# EAGLE board fox (EAGLE 4.16)
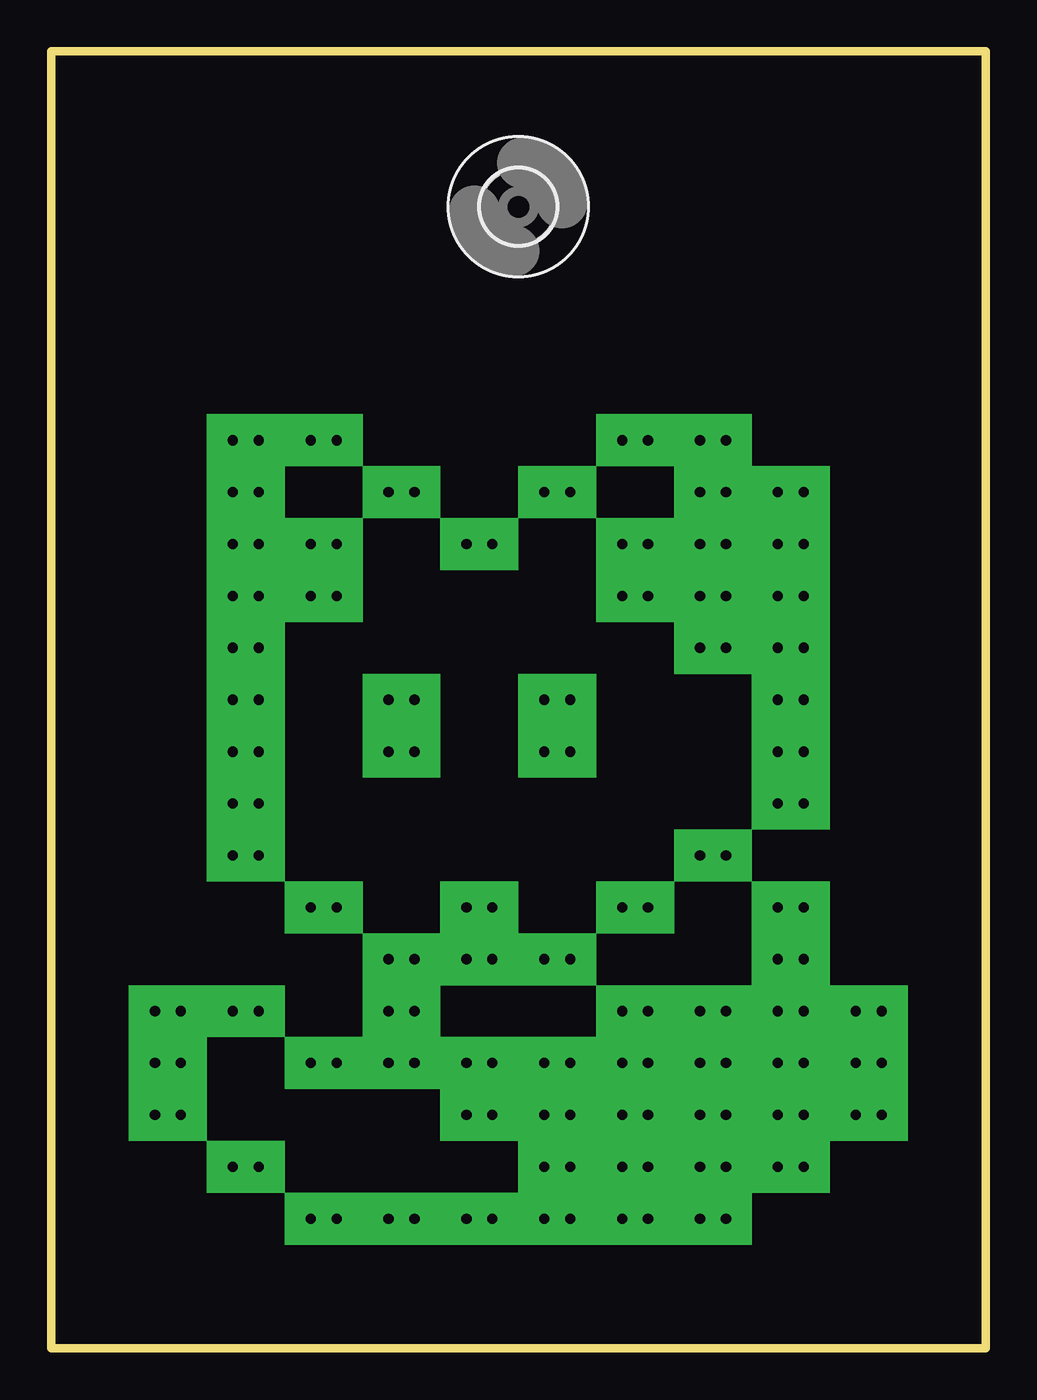
[diagram p0: board, top side]

Size 45.72 x 63.5 mm. Coordinates in mm from the lower left corner, seen from the top.
Outline: 0,63.5 0,0 45.72,0 45.72,63.5 0,63.5
Copper layers (1*16): Top 0.035mm / dielectric 1.5mm / Bottom 0.035mm
Design rules "default": minimum track width 10mil, minimum drill 24mil, track to track 8mil, track to pad 8mil, pad to pad 8mil, via to via 8mil, smd to smd 8mil, copper to edge 40mil, drill to drill 8mil, minimum pad ring 10mil, minimum via ring 8mil, stop-mask expansion 4mil, vias tented up to drill 0mil, thermal gap 10mil

## Footprints (pad centres in the part's own frame; a part is rotated, then mirrored left to right if it is on the bottom)
3,6 = hole 3.6: 0,0

## Placement (x,y rotation side)
E$1  [3,6]  22.86,55.88 0 top

## Library data of the parts
E$1 = Basic

## Tracks (layer width: path | path; a pad name or v marks a point on that pad's centre or on a via)
S$71  (via drill 0.5 pad 2.54)
  other vias: 12.7,6.35
S$72  (via drill 0.5 pad 2.54)
  other vias: 13.97,6.35
S$73  (via drill 0.5 pad 2.54)
  other vias: 16.51,6.35
S$81  (via drill 0.5 pad 2.54)
  other vias: 17.78,6.35
S$82  (via drill 0.5 pad 2.54)
  other vias: 20.32,6.35
S$83  (via drill 0.5 pad 2.54)
  other vias: 21.59,6.35
S$84  (via drill 0.5 pad 2.54)
  other vias: 24.13,6.35
S$85  (via drill 0.5 pad 2.54)
  other vias: 25.4,6.35
S$86  (via drill 0.5 pad 2.54)
  other vias: 27.94,6.35
S$87  (via drill 0.5 pad 2.54)
  other vias: 29.21,6.35
S$88  (via drill 0.5 pad 2.54)
  other vias: 31.75,6.35
S$89  (via drill 0.5 pad 2.54)
  other vias: 33.02,6.35
S$90  (via drill 0.5 pad 2.54)
  other vias: 10.16,8.89
S$91  (via drill 0.5 pad 2.54)
  other vias: 8.89,8.89
S$92  (via drill 0.5 pad 2.54)
  other vias: 6.35,11.43
S$93  (via drill 0.5 pad 2.54)
  other vias: 5.08,11.43
S$94  (via drill 0.5 pad 2.54)
  other vias: 5.08,13.97
S$95  (via drill 0.5 pad 2.54)
  other vias: 6.35,13.97
S$96  (via drill 0.5 pad 2.54)
  other vias: 5.08,16.51
S$97  (via drill 0.5 pad 2.54)
  other vias: 6.35,16.51
S$98  (via drill 0.5 pad 2.54)
  other vias: 8.89,16.51
S$99  (via drill 0.5 pad 2.54)
  other vias: 10.16,16.51
S$100  (via drill 0.5 pad 2.54)
  other vias: 12.7,13.97
S$101  (via drill 0.5 pad 2.54)
  other vias: 13.97,13.97
S$102  (via drill 0.5 pad 2.54)
  other vias: 16.51,13.97
S$103  (via drill 0.5 pad 2.54)
  other vias: 17.78,13.97
S$104  (via drill 0.5 pad 2.54)
  other vias: 20.32,13.97
S$105  (via drill 0.5 pad 2.54)
  other vias: 21.59,13.97
S$106  (via drill 0.5 pad 2.54)
  other vias: 31.75,8.89
S$107  (via drill 0.5 pad 2.54)
  other vias: 33.02,8.89
S$108  (via drill 0.5 pad 2.54)
  other vias: 35.56,8.89
S$109  (via drill 0.5 pad 2.54)
  other vias: 36.83,8.89
S$110  (via drill 0.5 pad 2.54)
  other vias: 29.21,8.89
S$111  (via drill 0.5 pad 2.54)
  other vias: 27.94,8.89
S$112  (via drill 0.5 pad 2.54)
  other vias: 25.4,8.89
S$113  (via drill 0.5 pad 2.54)
  other vias: 24.13,8.89
S$114  (via drill 0.5 pad 2.54)
  other vias: 21.59,11.43
S$115  (via drill 0.5 pad 2.54)
  other vias: 20.32,11.43
S$116  (via drill 0.5 pad 2.54)
  other vias: 24.13,11.43
S$117  (via drill 0.5 pad 2.54)
  other vias: 25.4,11.43
S$118  (via drill 0.5 pad 2.54)
  other vias: 27.94,11.43
S$119  (via drill 0.5 pad 2.54)
  other vias: 29.21,11.43
S$120  (via drill 0.5 pad 2.54)
  other vias: 31.75,11.43
S$121  (via drill 0.5 pad 2.54)
  other vias: 33.02,11.43
S$122  (via drill 0.5 pad 2.54)
  other vias: 35.56,11.43
S$123  (via drill 0.5 pad 2.54)
  other vias: 36.83,11.43
S$124  (via drill 0.5 pad 2.54)
  other vias: 39.37,11.43
S$125  (via drill 0.5 pad 2.54)
  other vias: 40.64,11.43
S$126  (via drill 0.5 pad 2.54)
  other vias: 40.64,13.97
S$127  (via drill 0.5 pad 2.54)
  other vias: 39.37,13.97
S$128  (via drill 0.5 pad 2.54)
  other vias: 40.64,16.51
S$129  (via drill 0.5 pad 2.54)
  other vias: 39.37,16.51
S$130  (via drill 0.5 pad 2.54)
  other vias: 36.83,16.51
S$131  (via drill 0.5 pad 2.54)
  other vias: 35.56,16.51
S$132  (via drill 0.5 pad 2.54)
  other vias: 35.56,19.05
S$133  (via drill 0.5 pad 2.54)
  other vias: 36.83,19.05
S$134  (via drill 0.5 pad 2.54)
  other vias: 36.83,21.59
S$135  (via drill 0.5 pad 2.54)
  other vias: 35.56,21.59
S$136  (via drill 0.5 pad 2.54)
  other vias: 33.02,24.13
S$137  (via drill 0.5 pad 2.54)
  other vias: 31.75,24.13
S$138  (via drill 0.5 pad 2.54)
  other vias: 29.21,21.59
S$139  (via drill 0.5 pad 2.54)
  other vias: 27.94,21.59
S$140  (via drill 0.5 pad 2.54)
  other vias: 25.4,19.05
S$141  (via drill 0.5 pad 2.54)
  other vias: 24.13,19.05
S$142  (via drill 0.5 pad 2.54)
  other vias: 21.59,19.05
S$143  (via drill 0.5 pad 2.54)
  other vias: 20.32,19.05
S$144  (via drill 0.5 pad 2.54)
  other vias: 20.32,21.59
S$145  (via drill 0.5 pad 2.54)
  other vias: 21.59,21.59
S$146  (via drill 0.5 pad 2.54)
  other vias: 17.78,19.05
S$147  (via drill 0.5 pad 2.54)
  other vias: 16.51,19.05
S$148  (via drill 0.5 pad 2.54)
  other vias: 16.51,16.51
S$149  (via drill 0.5 pad 2.54)
  other vias: 17.78,16.51
S$150  (via drill 0.5 pad 2.54)
  other vias: 13.97,21.59
S$151  (via drill 0.5 pad 2.54)
  other vias: 12.7,21.59
S$152  (via drill 0.5 pad 2.54)
  other vias: 10.16,24.13
S$153  (via drill 0.5 pad 2.54)
  other vias: 8.89,24.13
S$154  (via drill 0.5 pad 2.54)
  other vias: 8.89,26.67
S$155  (via drill 0.5 pad 2.54)
  other vias: 10.16,26.67
S$156  (via drill 0.5 pad 2.54)
  other vias: 10.16,29.21
S$157  (via drill 0.5 pad 2.54)
  other vias: 8.89,29.21
S$158  (via drill 0.5 pad 2.54)
  other vias: 8.89,31.75
S$159  (via drill 0.5 pad 2.54)
  other vias: 10.16,31.75
S$160  (via drill 0.5 pad 2.54)
  other vias: 10.16,34.29
S$161  (via drill 0.5 pad 2.54)
  other vias: 10.16,36.83
S$162  (via drill 0.5 pad 2.54)
  other vias: 10.16,39.37
S$163  (via drill 0.5 pad 2.54)
  other vias: 10.16,41.91
S$164  (via drill 0.5 pad 2.54)
  other vias: 10.16,44.45
S$165  (via drill 0.5 pad 2.54)
  other vias: 8.89,44.45
S$166  (via drill 0.5 pad 2.54)
  other vias: 8.89,41.91
S$167  (via drill 0.5 pad 2.54)
  other vias: 8.89,39.37
S$168  (via drill 0.5 pad 2.54)
  other vias: 8.89,36.83
S$169  (via drill 0.5 pad 2.54)
  other vias: 8.89,34.29
S$170  (via drill 0.5 pad 2.54)
  other vias: 12.7,44.45
S$171  (via drill 0.5 pad 2.54)
  other vias: 13.97,44.45
S$172  (via drill 0.5 pad 2.54)
  other vias: 16.51,41.91
S$173  (via drill 0.5 pad 2.54)
  other vias: 17.78,41.91
S$174  (via drill 0.5 pad 2.54)
  other vias: 20.32,39.37
S$175  (via drill 0.5 pad 2.54)
  other vias: 21.59,39.37
S$176  (via drill 0.5 pad 2.54)
  other vias: 24.13,41.91
S$177  (via drill 0.5 pad 2.54)
  other vias: 25.4,41.91
S$178  (via drill 0.5 pad 2.54)
  other vias: 27.94,44.45
S$179  (via drill 0.5 pad 2.54)
  other vias: 29.21,44.45
S$180  (via drill 0.5 pad 2.54)
  other vias: 31.75,44.45
S$181  (via drill 0.5 pad 2.54)
  other vias: 33.02,44.45
S$182  (via drill 0.5 pad 2.54)
  other vias: 35.56,41.91
S$183  (via drill 0.5 pad 2.54)
  other vias: 36.83,41.91
S$184  (via drill 0.5 pad 2.54)
  other vias: 36.83,39.37
S$185  (via drill 0.5 pad 2.54)
  other vias: 36.83,36.83
S$186  (via drill 0.5 pad 2.54)
  other vias: 36.83,34.29
S$187  (via drill 0.5 pad 2.54)
  other vias: 36.83,31.75
S$188  (via drill 0.5 pad 2.54)
  other vias: 36.83,29.21
S$189  (via drill 0.5 pad 2.54)
  other vias: 36.83,26.67
S$190  (via drill 0.5 pad 2.54)
  other vias: 35.56,26.67
S$191  (via drill 0.5 pad 2.54)
  other vias: 35.56,29.21
S$192  (via drill 0.5 pad 2.54)
  other vias: 35.56,31.75
S$193  (via drill 0.5 pad 2.54)
  other vias: 35.56,34.29
S$194  (via drill 0.5 pad 2.54)
  other vias: 35.56,36.83
S$195  (via drill 0.5 pad 2.54)
  other vias: 35.56,39.37
S$196  (via drill 0.5 pad 2.54)
  other vias: 33.02,41.91
S$197  (via drill 0.5 pad 2.54)
  other vias: 31.75,41.91
S$198  (via drill 0.5 pad 2.54)
  other vias: 31.75,39.37
S$199  (via drill 0.5 pad 2.54)
  other vias: 33.02,39.37
S$200  (via drill 0.5 pad 2.54)
  other vias: 33.02,36.83
S$201  (via drill 0.5 pad 2.54)
  other vias: 31.75,36.83
S$202  (via drill 0.5 pad 2.54)
  other vias: 33.02,34.29
S$203  (via drill 0.5 pad 2.54)
  other vias: 31.75,34.29
S$204  (via drill 0.5 pad 2.54)
  other vias: 29.21,36.83
S$205  (via drill 0.5 pad 2.54)
  other vias: 27.94,36.83
S$206  (via drill 0.5 pad 2.54)
  other vias: 29.21,39.37
S$207  (via drill 0.5 pad 2.54)
  other vias: 27.94,39.37
S$208  (via drill 0.5 pad 2.54)
  other vias: 13.97,39.37
S$209  (via drill 0.5 pad 2.54)
  other vias: 12.7,39.37
S$210  (via drill 0.5 pad 2.54)
  other vias: 13.97,36.83
S$211  (via drill 0.5 pad 2.54)
  other vias: 12.7,36.83
S$212  (via drill 0.5 pad 2.54)
  other vias: 24.13,13.97
S$213  (via drill 0.5 pad 2.54)
  other vias: 25.4,13.97
S$214  (via drill 0.5 pad 2.54)
  other vias: 27.94,13.97
S$215  (via drill 0.5 pad 2.54)
  other vias: 29.21,13.97
S$216  (via drill 0.5 pad 2.54)
  other vias: 31.75,13.97
S$217  (via drill 0.5 pad 2.54)
  other vias: 33.02,13.97
S$218  (via drill 0.5 pad 2.54)
  other vias: 35.56,13.97
S$219  (via drill 0.5 pad 2.54)
  other vias: 36.83,13.97
S$220  (via drill 0.5 pad 2.54)
  other vias: 27.94,16.51
S$221  (via drill 0.5 pad 2.54)
  other vias: 29.21,16.51
S$222  (via drill 0.5 pad 2.54)
  other vias: 31.75,16.51
S$223  (via drill 0.5 pad 2.54)
  other vias: 33.02,16.51
S$224  (via drill 0.5 pad 2.54)
  other vias: 16.51,31.75
S$225  (via drill 0.5 pad 2.54)
  other vias: 17.78,31.75
S$226  (via drill 0.5 pad 2.54)
  other vias: 16.51,29.21
S$227  (via drill 0.5 pad 2.54)
  other vias: 17.78,29.21
S$228  (via drill 0.5 pad 2.54)
  other vias: 24.13,31.75
S$229  (via drill 0.5 pad 2.54)
  other vias: 25.4,31.75
S$230  (via drill 0.5 pad 2.54)
  other vias: 24.13,29.21
S$231  (via drill 0.5 pad 2.54)
  other vias: 25.4,29.21